# Altium PCB PCB1.PcbDoc
Units mil, origin at the board's own origin, x right, y up, seen from the top; angles counter-clockwise.
Board outline 6000 x 4000 mil, 2 copper layers (Top Layer, Bottom Layer); 71 components, 82 nets, 284 pads, 89 vias.
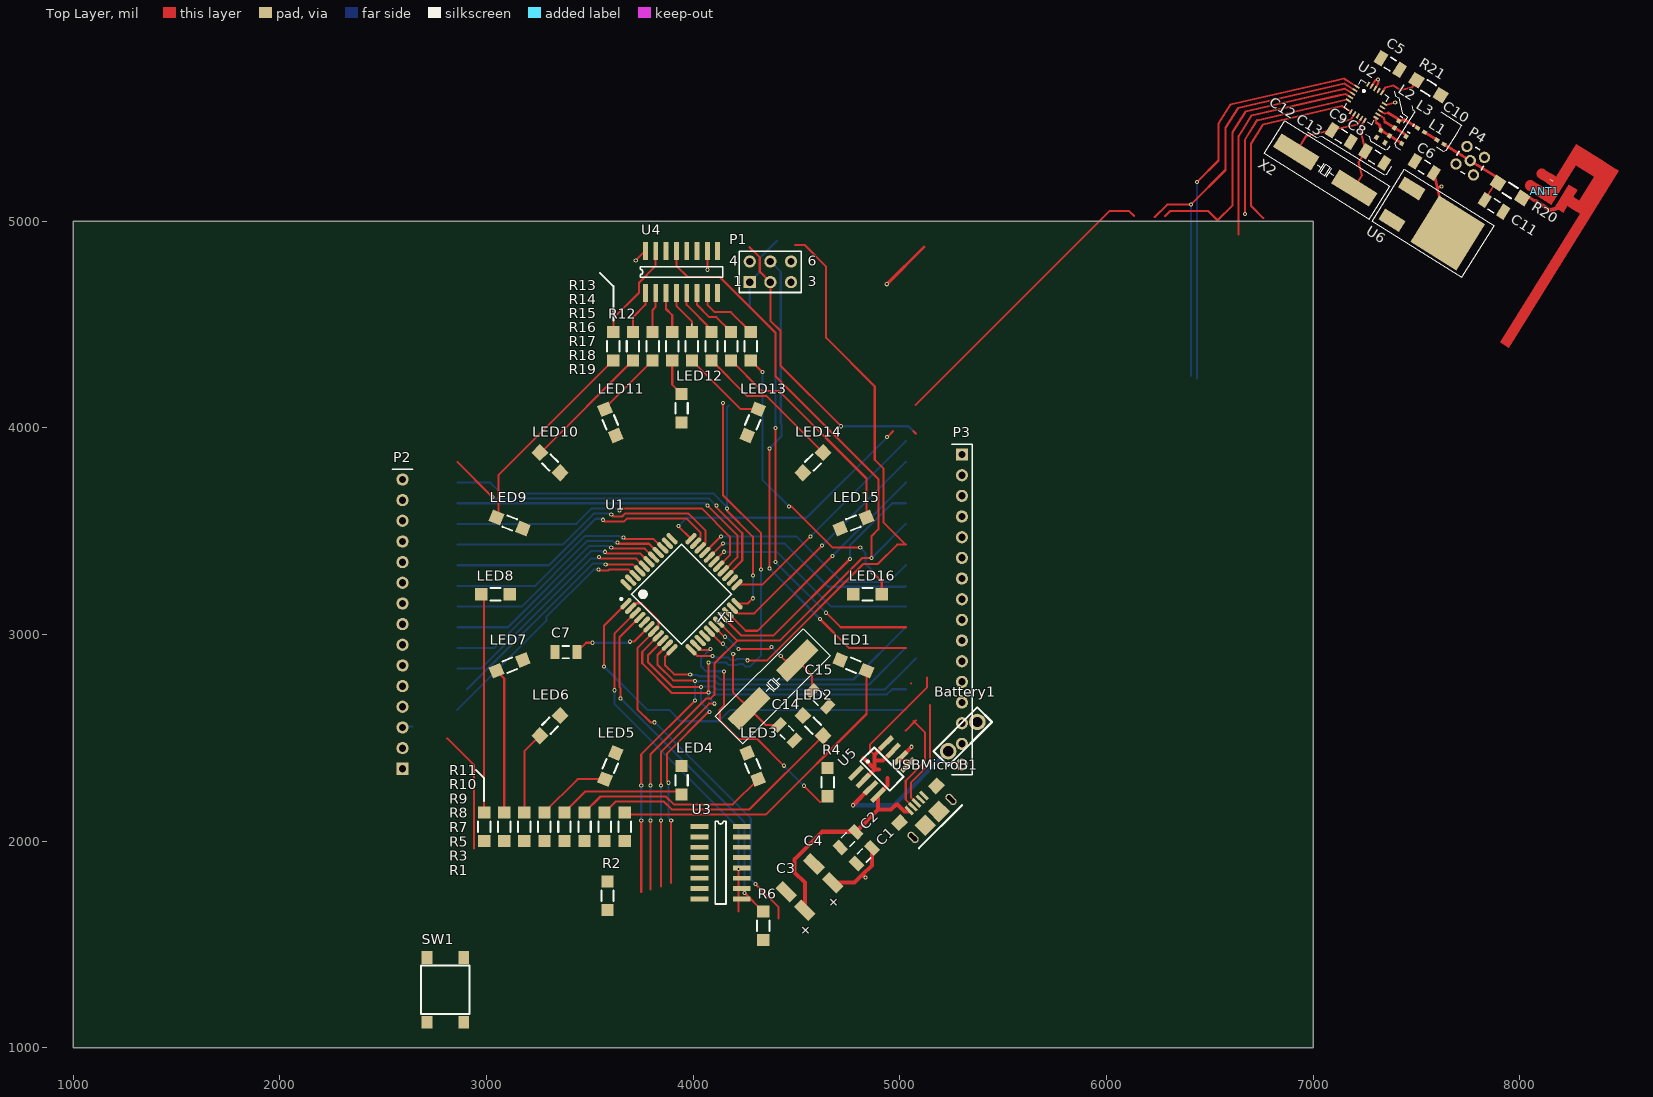
[diagram p0: Top Layer view]
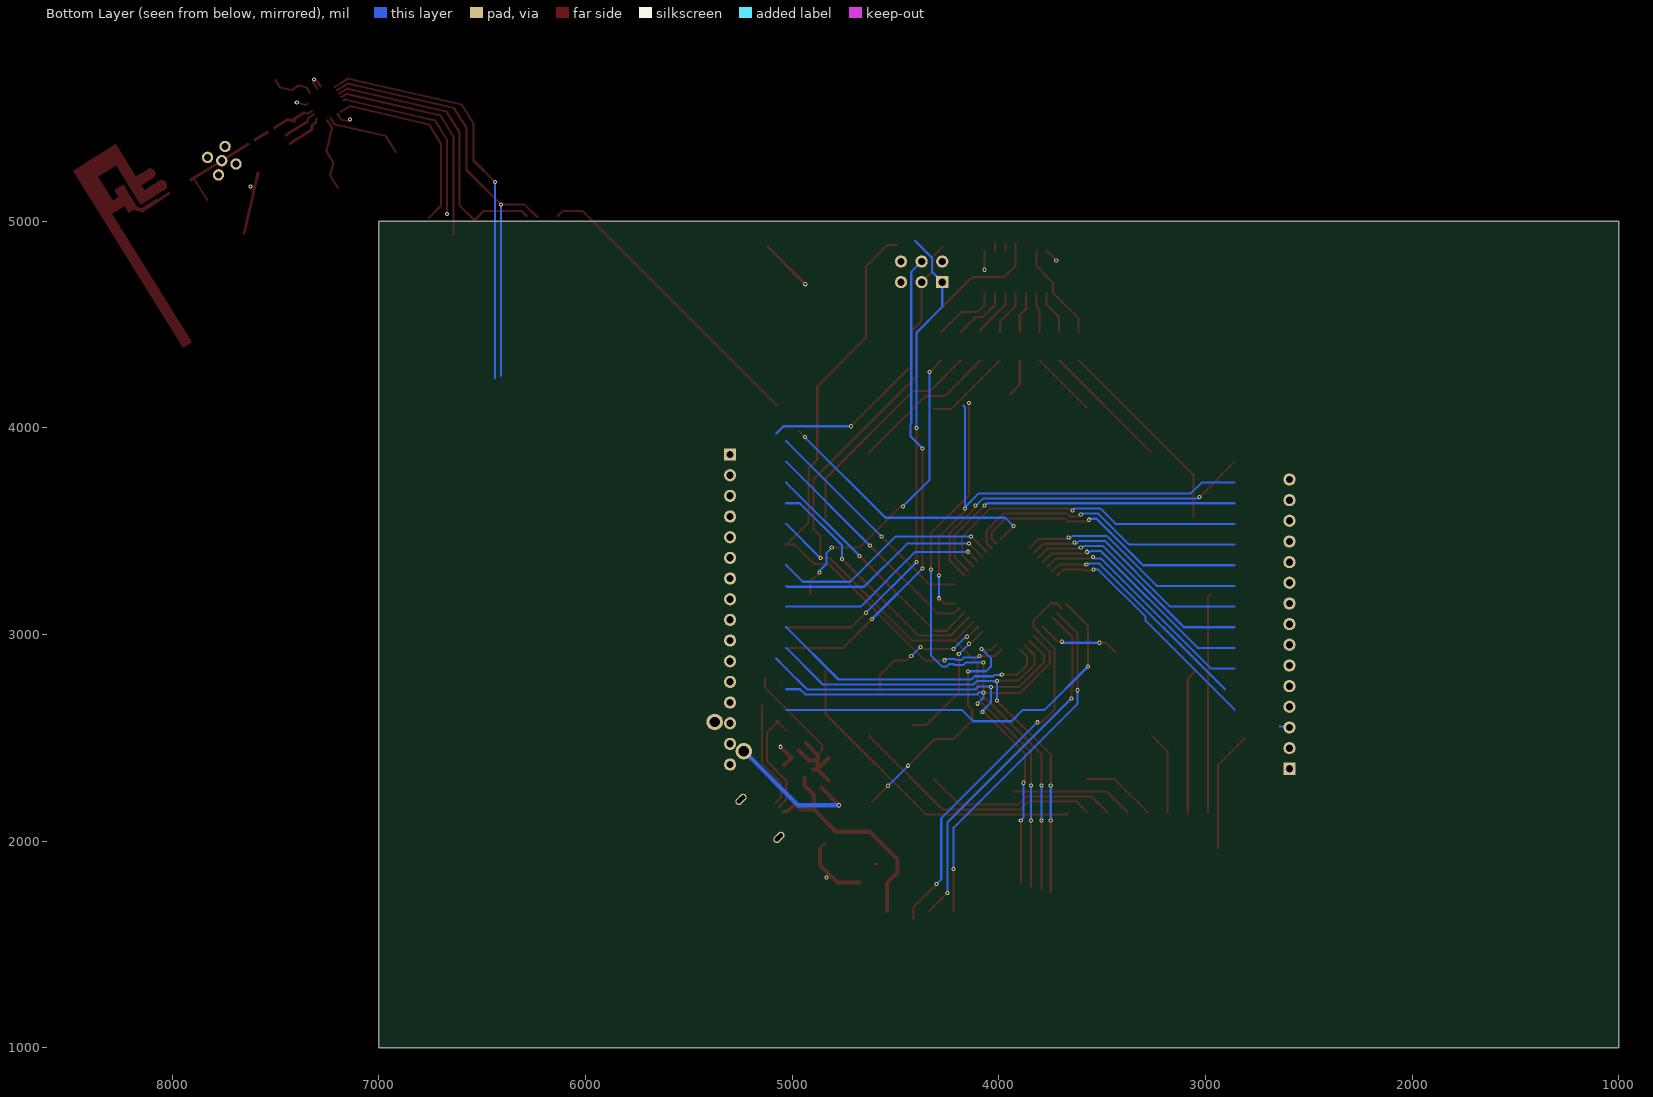
[diagram p1: Bottom Layer view, seen from below]

## Layer stack, top to bottom
Top Solder: solder mask 0.4, Solder Resist, Dk 3.5
Top Layer: signal copper 1.4
Dielectric 1: dielectric 12.6, FR-4, Dk 4.8
Bottom Layer: signal copper 1.4
Bottom Solder: solder mask 0.4, Solder Resist, Dk 3.5

## Board outline
1000,1000 7000,1000 7000,5000 1000,5000

## Design rules (kind name [scope] priority, off if disabled: settings)
Clearance [All] p1: gap=10
PolygonConnect [All] p1: connectstyle=Relief reliefconductorwidth=10 reliefentries=4 polygonreliefangle="90 Angle" airgapwidth=10
RoutingVias [All] p1: holewidth=28 width=50 viastyle="Through Hole" minholewidth=28 minwidth=50 maxholewidth=28 maxwidth=50
SolderMaskExpansion [All] p1: expansion=4
UnpouredPolygon [All] p1: allowunpoured=FALSE
Width [All] p1: maxlimit=10 minlimit=10 preferedwidth=10
29 further rules are at their usual default settings.

## Classes and differential pairs
component class MainBoard: 40 FET1

## Components (designator, comment, footprint, x,y, rotation, side; value= is the part's Value field where it differs from the comment)
ANT1 "INV_F_ANTENNA" INV_F_PCB_ANTENNA 8274.5,5375.87 r238 top
Battery1 "PowerPins" PowerPins_PCB 5303.9,2505.4 r45 top
C1 "Cap Semi" C1206 4826.6,1929.11 r45 top
C2 "Cap Semi" C1206 4748.82,2006.89 r45 top
C3 "Electrolytic Capacitor" sheityCapPackage 4529.62,1674.55 r45 top
C4 "Electrolytic Capacitor" sheityCapPackage 4663.97,1808.9 r45 top
C5 "Cap Semi" C1206 7372.89,5759.71 r148 top
C6 "Cap Semi" C1206 7537.67,5260.82 r328 top
C7 "Cap Semi" C1206 3383.16,2914.39 r180 top
C8 "Cap Semi" 0402 7358.44,5395.41 r58 top
C9 "Cap Semi" 0402 7316.04,5421.91 r58 top
C10 "Cap Semi" 0402 7615.49,5382.19 r148 top
C11 "Cap Semi" C1206 7874.77,5073.76 r328 top
C12 "Cap Semi" C1206 7136.45,5411.3 r148 top
C13 "Cap Semi" C1206 7298.16,5309.39 r148 top
C14 "Cap Semi" C1206 4453.16,2524.39 r315 top
C15 "Cap Semi" C1206 4613.16,2689.39 r315 top
L1 "Inductor" 0402-A 7522.2,5440.48 r328 top
L2 "Inductor" 0402-A 7403.48,5467.5 r238 top
L3 "Inductor" 0402-A 7439,5392.24 r238 top
LED1 "LED_Green_1206Package" 1206Package_PCB 4774.65,2849.97 r157.5 top
LED2 "LED_Green_1206Package" 1206Package_PCB 4579.56,2557.99 r135 top
LED3 "LED_Green_1206Package" 1206Package_PCB 4287.57,2362.89 r112.5 top
LED4 "LED_Green_1206Package" 1206Package_PCB 3943.16,2294.39 r90 top
LED5 "LED_Green_1206Package" 1206Package_PCB 3598.74,2362.89 r67.5 top
LED6 "LED_Green_1206Package" 1206Package_PCB 3306.76,2557.99 r45 top
LED7 "LED_Green_1206Package" 1206Package_PCB 3111.67,2849.97 r22.5 top
LED8 "LED_Green_1206Package" 1206Package_PCB 3043.16,3194.39 r0 top
LED9 "LED_Green_1206Package" 1206Package_PCB 3111.67,3538.8 r337.5 top
LED10 "LED_Green_1206Package" 1206Package_PCB 3306.76,3830.78 r315 top
LED11 "LED_Green_1206Package" 1206Package_PCB 3598.74,4025.88 r292.5 top
LED12 "LED_Green_1206Package" 1206Package_PCB 3943.16,4094.39 r270 top
LED13 "LED_Green_1206Package" 1206Package_PCB 4287.57,4025.88 r247.5 top
LED14 "LED_Green_1206Package" 1206Package_PCB 4579.56,3830.78 r225 top
LED15 "LED_Green_1206Package" 1206Package_PCB 4774.65,3538.8 r202.5 top
LED16 "LED_Green_1206Package" 1206Package_PCB 4843.16,3194.39 r180 top
P1 "Header 3X2A" HDR2X3_CEN 4273.16,4704.39 r0 top
P2 "Header 15" HDR1X15 2593.16,2349.59 r90 top
P3 "Header 16" HDR1X16 5300,3870 r270 top
P4 "COAX-M" MMCX2.54-V5 7759.66,5292.1 r328 top
R1 "Resistor_1206Package" 1206Package_PCB 3668.16,2069.39 r90 top
R2 "Resistor_1206Package" 1206Package_PCB 3585,1735 r270 top
R3 "Resistor_1206Package" 1206Package_PCB 3571.02,2069.39 r90 top
R4 "Resistor_1206Package" 1206Package_PCB 4650,2285 r270 top
R5 "Resistor_1206Package" 1206Package_PCB 3473.87,2069.39 r90 top
R6 "Resistor_1206Package" 1206Package_PCB 4338.16,1589.39 r270 top
R7 "Resistor_1206Package" 1206Package_PCB 3376.73,2069.39 r90 top
R8 "Resistor_1206Package" 1206Package_PCB 3279.59,2069.39 r90 top
R9 "Resistor_1206Package" 1206Package_PCB 3182.45,2069.39 r90 top
R10 "Resistor_1206Package" 1206Package_PCB 3085.3,2069.39 r90 top
R11 "Resistor_1206Package" 1206Package_PCB 2988.16,2069.39 r90 top
R12 "Resistor_1206Package" 1206Package_PCB 3613.16,4394.39 r270 top
R13 "Resistor_1206Package" 1206Package_PCB 3708.16,4394.39 r270 top
R14 "Resistor_1206Package" 1206Package_PCB 3803.16,4394.39 r270 top
R15 "Resistor_1206Package" 1206Package_PCB 3898.16,4394.39 r270 top
R16 "Resistor_1206Package" 1206Package_PCB 3993.16,4394.39 r270 top
R17 "Resistor_1206Package" 1206Package_PCB 4088.16,4394.39 r270 top
R18 "Resistor_1206Package" 1206Package_PCB 4183.16,4394.39 r270 top
R19 "Resistor_1206Package" 1206Package_PCB 4278.16,4394.39 r270 top
R20 "Resistor_1206Package" 1206Package_PCB 7952.7,5147.73 r328 top
R21 "Resistor_1206Package" 1206Package_PCB 7557.89,5644.71 r328 top
SW1 "PushButton" TactileSwitchPCB 2800,1280 r90 top
U1 "ATmega32U4-AU" 44ML_N 3943.16,3194.39 r45 top
U2 "nRF24L01+" 20-VFQFN 7182.47,5528.96 r328 top
U3 "8BitShiftReg" 16-SOIC 4030,2070 r0 top
U4 "8BitShiftReg" 16-SOIC 3768.16,4651.08 r90 top
U5 "DualNP-ChFET" 8-SOIC 4893.78,2222.55 r45 top
U6 "LD1117DT33TR" DPAK 7477.07,5157.83 r238 top
USBMicroB1 "Micro USB Receptacle Type B" USBMicroB_PCB 5155.41,2109.42 r45 top
X1 "HC-49S" HC-49S 4503.16,2874.39 r225 top
X2 "HC-49S" HC-49S 6918.16,5334.39 r328 top

## Footprints (in the part's own frame and the unit in brackets; to place one, negate y for a bottom-side part, rotate by r counter-clockwise, add the part's x,y. Pads: shape width x height; smd on the part's side, far side on the other; paste and mask are expansions set on the pad)
8-SOIC [mm]
  rect 2.2x0.6 smd: 1(0,3.81) 2(0,2.54) 3(0,1.27) 4(0,0) 5(5.2,0) 6(5.2,1.27) 7(5.2,2.54) 8(5.2,3.81)
  silkscreen extent 1.4,-0.63 3.81,4.45
16-SOIC [mm]
  rect 2.2x0.6 smd: 1(0,0) 2(0,-1.27) 3(0,-2.54) 4(0,-3.81) 5(0,-5.08) 6(0,-6.35) 7(0,-7.62) 8(0,-8.89) 9(5.2,-8.89) 10(5.2,-7.62) 11(5.2,-6.35) 12(5.2,-5.08) 13(5.2,-3.81) 14(5.2,-2.54) 15(5.2,-1.27) 16(5.2,0)
  silkscreen extent 1.94,-9.53 3.27,0.64
20-VFQFN [mm] "The package"
  rect 0.7x0.25 smd: 1(-1,3) 2(-1,2.5) 3(-1,2) 4(-1,1.5) 5(-1,1) 11(3,1) 12(3,1.5) 13(3,2) 14(3,2.5) 15(3,3)
  rect 0.25x0.7 smd: 6(0,0) 7(0.5,0) 8(1,0) 9(1.5,0) 10(2,0) 16(2,4) 17(1.5,4) 18(1,4) 19(0.5,4) 20(0,4)
  silkscreen extent -1,0 3,4
44ML_N [mm] "Thin QFP, 44-Leads, Body 10x10mm, Pitch 0.8mm, IPC Medium Density"
  oval 1.75x0.55 smd: 1(-5.65,4) 2(-5.65,3.2) 3(-5.65,2.4) 4(-5.65,1.6) 5(-5.65,0.8) 6(-5.65,0) 7(-5.65,-0.8) 8(-5.65,-1.6) 9(-5.65,-2.4) 10(-5.65,-3.2) 11(-5.65,-4) 23(5.65,-4) 24(5.65,-3.2) 25(5.65,-2.4) 26(5.65,-1.6) 27(5.65,-0.8) 28(5.65,0) 29(5.65,0.8) 30(5.65,1.6) 31(5.65,2.4) 32(5.65,3.2) 33(5.65,4)
  oval 0.55x1.75 smd: 12(-4,-5.65) 13(-3.2,-5.65) 14(-2.4,-5.65) 15(-1.6,-5.65) 16(-0.8,-5.65) 17(0,-5.65) 18(0.8,-5.65) 19(1.6,-5.65) 20(2.4,-5.65) 21(3.2,-5.65) 22(4,-5.65) 34(4,5.65) 35(3.2,5.65) 36(2.4,5.65) 37(1.6,5.65) 38(0.8,5.65) 39(0,5.65) 40(-0.8,5.65) 41(-1.6,5.65) 42(-2.4,5.65) 43(-3.2,5.65) 44(-4,5.65)
  silkscreen extent -5.77,-4.35 4.35,4.95, body extent -5,-5 5,5, height 1.2
0402 [mm] "Chip Capacitor, Body 1.0x0.5mm, IPC High Density"
  rect 0.6x0.5 smd: 1(-0.5,0) 2(0.5,0)
  body extent -0.55,-0.3 0.55,0.3, height 1.3
0402-A [mm] "Chip Inductor, Body 1.0x0.5mm, IPC High Density"
  rect 0.6x0.5 smd: 1(-0.5,0) 2(0.5,0)
  silkscreen extent -1.1,-0.15 -1.1,0.15, body extent -0.55,-0.3 0.55,0.3, height 0.55
1206Package_PCB [mm]
  rect 1.5x1.5 smd: 1(-1.75,0) 2(1.75,0)
  silkscreen extent -0.64,-0.76 0.64,0.76
C1206 [mm] "Chip Capacitor, Body 3.2x1.6mm, IPC High Density"
  rect 1.1x1.7 smd: 1(-1.35,0) 2(1.35,0)
  silkscreen extent -0.4,-0.75 0.4,0.75, body extent -1.7,-0.9 1.7,0.9, height 1.3
DPAK [mm]
  rect 1.6x3 smd: 1(0,0) 3(4.6,0)
  rect 6.7x6.7 smd: 2(2.3,6.65)
  silkscreen extent -1.5,-2 6,11
HC-49S [mm]
  rect 5.5x2 smd: 1(0,0) 2(8.375,0)
  silkscreen extent -3.25,-2.25 12,2.5
HDR1X15 [mm] "Connector; Header; 15 Position"
  rect 1.5x1.5 hole 0.9: 1(0,0)
  round 1.5 hole 0.9: 2(2.54,0) 3(5.08,0) 4(7.62,0) 5(10.16,0) 6(12.7,0) 7(15.24,0) 8(17.78,0) 9(20.32,0) 10(22.86,0) 11(25.4,0) 12(27.94,0) 13(30.48,0) 14(33.02,0) 15(35.56,0)
  silkscreen extent 36.83,-1.27 36.83,1.27
HDR1X16 [mm] "Connector; Header; 16 Position"
  rect 1.5x1.5 hole 0.9: 1(0,0)
  round 1.5 hole 0.9: 2(2.54,0) 3(5.08,0) 4(7.62,0) 5(10.16,0) 6(12.7,0) 7(15.24,0) 8(17.78,0) 9(20.32,0) 10(22.86,0) 11(25.4,0) 12(27.94,0) 13(30.48,0) 14(33.02,0) 15(35.56,0) 16(38.1,0)
  silkscreen extent -1.27,-1.27 39.37,1.27
HDR2X3_CEN [mm] "Connector; Header; 3x2 Position"
  rect 1.5x1.5 hole 0.9: 1(0,0)
  round 1.5 hole 0.9: 2(2.54,0) 3(5.08,0) 4(0,2.54) 5(2.54,2.54) 6(5.08,2.54)
  silkscreen extent -1.27,-1.27 6.35,3.81
INV_F_PCB_ANTENNA [mm]
  rect 0.2x0.5 smd: 1(5.5,-0.2) 2(7.25,-0.2) 3(8.696,-0.2)
  Top Layer region: 0.127,0.043 0.127,0.04 0.129,0.038 0.131,0.037 0.133,0.036 0.133,0.036 4.81,0.047 4.81,-0.598 4.811,-0.6 4.812,-0.602 4.814,-0.604 4.817,-0.604 4.817,-0.604 6.077,-0.601 6.081,-0.6 6.083,-0.598 6.084,-0.595 6.084,-0.595 6.084,0.05 6.775,0.052 6.775,-0.593 6.776,-0.596 6.777,-0.598 6.779,-0.599 6.782,-0.6 6.782,-0.6 8.016,-0.597 8.02,-0.596 8.022,-0.593 8.023,-0.59 8.023,-0.59 8.023,-0.033 8.023,1.343 8.022,1.346 8.021,1.348 8.019,1.35 8.016,1.35 8.016,1.35 2.32,1.337 2.32,3.977 5.81,3.985 5.81,3.109 4.817,3.107 4.814,3.106 4.811,3.103 4.81,3.1 4.81,3.1 4.81,1.897 4.811,1.895 4.812,1.893 4.814,1.891 4.817,1.891 4.817,1.891 8.014,1.898 8.459,1.456 8.459,-0.589 8.46,-0.592 8.461,-0.594 8.463,-0.595 8.466,-0.596 8.466,-0.596 8.926,-0.595 8.929,-0.594 8.932,-0.591 8.933,-0.588 8.933,-0.588 8.933,1.649 8.932,1.652 8.931,1.654 8.931,1.654 8.931,1.654 8.931,1.654 8.931,1.654 8.931,1.654 8.931,1.654 8.118,2.46 8.118,3.108 8.118,3.11 8.116,3.112 8.114,3.114 8.112,3.114 8.112,3.114 7.119,3.112 7.119,3.995 7.119,4.982 25.708,5.026 25.711,5.027 25.713,5.029 25.714,5.032 25.714,5.032 25.714,6.235 25.714,6.238 25.712,6.24 25.71,6.241 25.708,6.242 25.708,6.242 0.134,6.182 0.13,6.181 0.128,6.179 0.127,6.176 0.127,6.176 0.127,4.973 0.127,3.979 0.127,1.325
MMCX2.54-V5 [mm] "Connector; RF Coaxial, MMCX, Thru-Hole; 5 Position; Vertical"
  round 1.4 hole 0.85: 1(0,0) 2(-1.27,-1.27) 3(1.27,-1.27) 4(1.27,1.27) 5(-1.27,1.27)
  silkscreen extent -1.75,-1.75 1.75,1.75
PowerPins_PCB [mil]
  round 80 hole 50: 1(-100,0) 2(100,0)
  silkscreen extent -150,-50 150,50
sheityCapPackage [mm] "This is jank"
  rect 1.3x2.5 smd: 1(0,-0.375) 2(0,2.875)
TactileSwitchPCB [mm]
  rect 1.55x1.3 smd: 1(-3.975,2.25) 2(3.975,2.25) 3(-3.975,-2.25) 4(3.975,-2.25)
  silkscreen extent -3,-3 3,3
USBMicroB_PCB [mm]
  rect 0.4x1.35 smd: 1(-1.3,2.667) 2(-0.65,2.667) 3(0,2.675) 4(0.65,2.667) 5(1.3,2.667)
  oval 0.9x1.6 hole 0.5 slot 1.2 at 90 deg: CASE(-3.3,0) CASE(3.3,0)
  rect 1.6x1.4 smd: CASE(-3.2,2.45) CASE(3.2,2.45)
  rect 1.9x1.9 smd: CASE(-1.2,0) CASE(1.2,0)
  silkscreen extent -3.75,-1.45 3.75,-1.45

## Part data
ANT1: library part INV_V_ANTENNA
C1 C2 C5 C6 C7 C8 C9 C10 C11 C12 C13 C14 C15: "Capacitor (Semiconductor SIM Model)"
C3 C4: "asdf"
LED1 LED2 LED3 LED4 LED5 LED6 LED7 LED8 LED9 LED10 LED11 LED12 LED13 LED14 LED15 LED16: "Green LED"
P1: "Header, 3-Pin, Dual row"
P2: "Header, 15-Pin"
P3: "Header, 16-Pin"
P4: "RF Coaxial PCB Connector, MMCX; Thru-Hole, Vertical Mount Plug,  50 Ohm Impedance"
R1 R2 R3 R4 R5 R6 R7 R8 R9 R10 R11 R12 R13 R14 R15 R16 R17 R18 R19 R20 R21: "Resistor 1206"
SW1: library part TactileButton, "Normally open push button."
U1: "8-bit AVR Microcontroller, 2.7-5.5V, 32KB Flash, 2.5KB EEPROM, 1KB SRAM, USB Controller, 44-pin TQFP, Industrial Grade (-40°C to 85°C)"
U2: "2.4GHz RF Transceiver"
U3 U4: library part 8BitShiftRegister
U5: library part "Dual N & P-Channel MOSFET"
USBMicroB1: library part USBMicroB

## Free pads (board coordinates)
  rect 7.87x19.68 smd: 0(3993.16,4493.58)

## Via types
v1: diameter 20, hole 10, Top Layer to Bottom Layer, 89 vias

## Nets (pads, with @x,y where several pads share a name; then routed paths per layer and width w, separated by ;. In a path a pad name is that pad's centre, name@x,y a point inside that pad or via, vN(x,y) a via of type N, cw(c..) or ccw(c..) an arc to the next point about the centre after c; other vN are vias at no path point)
3V3: 
ANT1: 
ANT2: 
AREF: 
BATT: 
D+: 
D-: 
GND: 
HWB: 
MISO: 
MOSI: 
NetC7_1: 
NetC10_1: 
NetC10_2: 
NetC12_2: 
NetC13_2: 
NetC14_1: 
NetC15_1: 
NetE1_1: 
NetLED1_1: 
NetLED2_1: 
NetLED3_1: 
NetLED4_1: 
NetLED5_1: 
NetLED6_1: 
NetLED7_1: 
NetLED8_1: 
NetLED9_1: 
NetLED10_1: 
NetLED11_1: 
NetLED12_1: 
NetLED13_1: 
NetLED14_1: 
NetLED15_1: 
NetLED16_1: 
NetP2_3: 
NetP2_4: 
NetP2_5: 
NetP2_6: 
NetP2_7: 
NetP2_8: 
NetP2_9: 
NetP2_10: 
NetP2_11: 
NetP2_12: 
NetP2_14: 
NetP3_2: 
NetP3_3: 
NetP3_4: 
NetP3_7: 
NetP3_8: 
NetP3_9: 
NetR4_2: 
NetR6_2: 
PB7: 
PD0: 
PD5: 
PE2: 
PE6: 
Q0: 
Q1: 
Q2: 
Q3: 
Q4: 
Q5: 
Q6: 
Q7: 
Q8: 
Q9: 
Q10: 
Q11: 
Q12: 
Q13: 
Q14: 
Q15: 
RESET: 
RST: 
SCK: 
SS: 
USB: 
VCC: 
VDD_PA: 
pads on no net: ANT1.1 ANT1.2 ANT1.3 Battery1.1 Battery1.2 C1.1 C1.2 C2.1 C2.2 C3.1 C3.2 C4.1 C4.2 C5.1 C5.2 C6.1 C6.2 C7.1 C7.2 C8.1 C8.2 C9.1 C9.2 C10.1 C10.2 C11.1 C11.2 C12.1 C12.2 C13.1 C13.2 C14.1 C14.2 C15.1 C15.2 L1.1 L1.2 L2.1 L2.2 L3.1 L3.2 LED1.1 LED1.2 LED2.1 LED2.2 LED3.1 LED3.2 LED4.1 LED4.2 LED5.1 LED5.2 LED6.1 LED6.2 LED7.1 LED7.2 LED8.1 LED8.2 LED9.1 LED9.2 LED10.1 LED10.2 LED11.1 LED11.2 LED12.1 LED12.2 LED13.1 LED13.2 LED14.1 LED14.2 LED15.1 LED15.2 LED16.1 LED16.2 P1.1 P1.2 P1.3 P1.4 P1.5 P1.6 P2.1 P2.2 P2.3 P2.4 P2.5 P2.6 P2.7 P2.8 P2.9 P2.10 P2.11 P2.12 P2.13 P2.14 P2.15 P3.1 P3.2 P3.3 P3.4 P3.5 P3.6 P3.7 P3.8 P3.9 P3.10 P3.11 P3.12 P3.13 P3.14 P3.15 P3.16 P4.1 P4.2 P4.3 P4.4 P4.5 R1.1 R1.2 R2.1 R2.2 R3.1 R3.2 R4.1 R4.2 R5.1 R5.2 R6.1 R6.2 R7.1 R7.2 R8.1 R8.2 R9.1 R9.2 R10.1 R10.2 R11.1 R11.2 R12.1 R12.2 R13.1 R13.2 R14.1 R14.2 R15.1 R15.2 R16.1 R16.2 R17.1 R17.2 R18.1 R18.2 R19.1 R19.2 R20.1 R20.2 R21.1 R21.2 SW1.1 SW1.2 SW1.3 SW1.4 U1.1 U1.2 U1.3 U1.4 U1.5 U1.6 U1.7 U1.8 U1.9 U1.10 U1.11 U1.12 U1.13 U1.14 U1.15 U1.16 U1.17 U1.18 U1.19 U1.20 U1.21 U1.22 U1.23 U1.24 U1.25 U1.26 U1.27 U1.28 U1.29 U1.30 U1.31 U1.32 U1.33 U1.34 U1.35 U1.36 U1.37 U1.38 U1.39 U1.40 U1.41 U1.42 U1.43 U1.44 U2.1 U2.2 U2.3 U2.4 U2.5 U2.6 U2.7 U2.8 U2.9 U2.10 U2.11 U2.12 U2.13 U2.14 U2.15 U2.16 U2.17 U2.18 U2.19 U2.20 U3.1 U3.2 U3.3 U3.4 U3.5 U3.6 U3.7 U3.8 U3.9 U3.10 U3.11 U3.12 U3.13 U3.14 U3.15 U3.16 U4.1 U4.2 U4.3 U4.4 U4.5 U4.6 U4.7 U4.8 U4.9 U4.10 U4.11 U4.12 U4.13 U4.14 U4.15 U4.16 U5.1 U5.2 U5.3 U5.4 U5.5 U5.6 U5.7 U5.8 U6.1 U6.2 U6.3 USBMicroB1.1 USBMicroB1.2 USBMicroB1.3 USBMicroB1.4 USBMicroB1.5 USBMicroB1.CASE X1.1 X1.2 X2.1 X2.2
copper on no net: | length 95513.3
  Top Layer w3.94: 8060,5173.32 8116.56,5137.98
  Top Layer w10: 2809.63,2496.99 2939.63,2366.99 2939.63,1963.09 ; 2858.16,3834.39 v1(3028.16,3664.39) ; 2974.26,3194.39 2988.16,3180.49 2988.16,2138.28 ; 3048.01,2823.61 3085.3,2786.32 3085.3,2138.28 ; 3057.16,3565.17 3057.16,3769.49 3613.16,4325.49 ; 3182.45,2138.28 3182.45,2433.67 3258.05,2509.27 ; 3262.17,3879.5 3708.16,4325.49 ; 3279.59,2138.28 3440.55,2299.24 3572.38,2299.24 ; 3376.73,2138.28 3477.83,2239.39 3929.26,2239.39 ; 3436.31,2914.39 3481.31,2959.39 v1(3513.16,2959.39) ; 3473.87,2138.28 3550.98,2215.39 3867.34,2215.39 3905.76,2176.96 4191.66,2176.96 4313.94,2299.24 ; v1(3542.16,3313.39) 3547.16,3308.39 3588.17,3308.39 3593.17,3313.39 3688.17,3313.39 3716.7,3284.86 3719.06,3284.86 ; v1(3543.16,3374.39) 3551.16,3366.39 3724.26,3366.39 3762.42,3328.22 3763.6,3329.4 ; v1(3563.16,3554.39) 3571.16,3546.39 3665.11,3546.39 3680.11,3561.39 3966.33,3561.39 4035.62,3492.09 4035.62,3462.66 4016.09,3443.12 4011.37,3443.12 ; v1(3568.16,2844.39) 3568.16,3042.1 3674.52,3148.45 ; 3571.02,2138.28 3624.12,2191.39 3857.4,2191.39 3895.82,2152.96 4271.96,2152.96 4628.27,2509.27 ; 3572.38,4094.71 3803.16,4325.49 ; v1(3573.16,3399.39) 3582.16,3390.39 3744.8,3390.39 3784.69,3350.5 3785.87,3351.68 ; v1(3576.16,3337.39) 3708.72,3337.39 3740.15,3305.95 3741.33,3307.13 ; v1(3603.16,3419.39) 3608.16,3414.39 3765.34,3414.39 3806.96,3372.77 3808.14,3373.95 ; v1(3603.16,3579.39) 3612.16,3570.39 3655.17,3570.39 3670.17,3585.39 3976.27,3585.39 ; 3613.16,4463.28 3613.16,4529.39 3737.35,4653.58 3737.35,4702.26 3818.16,4783.07 3818.16,4855.8 ; v1(3618.16,2729.39) 3618.16,3003.01 3719.06,3103.91 ; v1(3633.16,3444.39) 3639.16,3438.39 3785.88,3438.39 3829.23,3395.04 ; v1(3643.16,3599.39) 3653.16,3609.39 4040.09,3609.39 4177.16,3472.31 4177.16,3383.39 4124.36,3330.58 ; v1(3648.16,2689.39) 3647.16,2690.39 3647.16,2741.4 3642.16,2746.4 3642.16,2984.83 3736.61,3079.28 3741.33,3079.28 ; v1(3663.16,3469.39) 3670.16,3462.39 3806.43,3462.39 3851.5,3417.31 ; 3668.16,2138.28 3668.16,2128.96 4352.73,2128.96 4838.3,2614.53 4838.3,2823.61 ; v1(3693.16,2964.39) 3713.16,2964.39 3785.87,3037.1 ; 3696.79,3126.18 3697.97,3125 3697.97,3129.72 3718.69,3150.44 3748.12,3150.44 3832.4,3066.16 3832.4,3036.72 3811.68,3016.01 3806.96,3016.01 3808.14,3014.83 3808.14,3012.47 3729.16,2933.48 3729.16,2638.39 3793.16,2574.39 v1(3813.16,2574.39) ; 3708.16,4463.28 3708.16,4534.39 3768.16,4594.39 3768.16,4651.08 ; v1(3721.74,4809.39) 3768.16,4855.8 ; 3748.16,1753.37 v1(3748.16,2099.39) ; v1(3748.16,2269.39) 3748.16,2419.39 v1(4008.16,2679.39) ; 3793.16,1764.43 v1(3793.16,2099.39) ; v1(3793.16,2269.39) 3793.16,2419.39 4064.16,2690.39 4085.17,2690.39 4102.16,2707.37 4102.16,2858.84 4212.7,2969.39 ; 3803.16,4463.28 3803.16,4569.39 3818.16,4584.39 3818.16,4651.08 ; 3830.41,2992.55 3753.16,2915.3 3753.16,2859.39 3897.16,2715.39 4069.16,2715.39 v1(4073.16,2719.39) v1(4073.16,2864.39) ; 3843.16,1780.49 v1(3843.16,2099.39) ; v1(3843.16,2269.39) 3843.16,2430.4 4077.15,2664.39 v1(4103.16,2664.39) ; 3852.68,2970.28 3780.13,2897.73 3780.13,2866.36 3901.1,2745.39 4037.16,2745.39 v1(4038.16,2744.39) ; 3868.16,4651.08 3868.16,4574.39 3898.16,4544.39 3898.16,4463.28 ; 3874.95,2948.01 3827.1,2900.16 3827.1,2853.33 3903.04,2777.39 4005.16,2777.39 v1(4008.16,2774.39) ; v1(3880.66,2281.89) 3873.16,2289.39 3873.16,2424.39 4073.16,2624.39 v1(4078.16,2624.39) ; 3893.16,1796.55 v1(3893.16,2099.39) ; 3897.23,2925.74 3863.16,2891.68 3863.16,2851.21 3907.98,2806.39 v1(3985.16,2806.39) ; 3898.16,4325.49 3898.16,4208.28 3943.16,4163.28 ; 3918.16,4651.08 3918.16,4589.39 3993.16,4514.39 3993.16,4463.28 ; 3918.16,4890.7 3918.16,4855.8 3918.16,4784.39 3973.16,4729.39 4128.16,4729.39 4398.16,4459.39 4398.16,4249.39 4895.88,3751.66 4895.88,3508.59 4863.16,3475.87 v1(4863.16,3369.39) 4818.16,3369.39 4418.16,2969.39 4212.7,2969.39 ; v1(3928.16,3523.97) 3989.09,3463.03 ; 3968.16,4651.08 3968.16,4594.39 4088.16,4474.39 4088.16,4463.28 ; 3968.16,4855.8 3968.16,4889.39 ; 3978.27,3583.39 4059.62,3502.03 4059.62,3442.12 4037.18,3419.67 4032.46,3419.67 ; 3989.09,2925.74 4020.45,2894.39 v1(4093.16,2894.39) ; 3993.16,4325.49 4229.12,4089.53 4313.94,4089.53 ; 4011.37,2948.01 4013.73,2948.01 4037.98,2923.75 4077.53,2923.75 v1(4083.16,2929.39) ; 4018.16,4651.08 4018.16,4594.39 4077.16,4535.39 4111.06,4535.39 4183.16,4463.28 ; 4018.16,4855.8 4018.16,4894.39 ; 4055.91,3396.22 v1(4134.08,3474.39) ; v1(4068.16,3624.39) 4213.16,3479.39 4213.16,3372.94 4148.53,3308.31 4143.81,3308.31 ; 4068.16,4651.08 4068.16,4594.39 4103.16,4559.39 4182.06,4559.39 4278.16,4463.28 ; v1(4068.16,4764.39) 4068.16,4855.8 ; 4078.18,3014.83 4138.62,2954.39 v1(4143.16,2954.39) ; 4078.18,3373.95 v1(4143.16,3438.93) ; 4088.16,4325.49 4259.26,4154.39 4353.39,4154.39 4628.27,3879.5 ; 4100.45,3037.1 4149.16,2988.39 v1(4152.69,2988.39) ; 4100.45,3351.68 v1(4148.16,3399.39) ; v1(4113.16,3624.39) 4113.16,3613.33 4237.16,3489.33 4237.16,3357.12 4167.26,3287.22 4167.26,3284.86 ; 4122.72,3059.37 4212.7,2969.39 ; v1(4143.16,4119.39) 4143.16,3674.39 4328.16,3489.39 v1(4328.16,3314.39) ; 4144.99,3081.64 4233.24,2993.39 4387.16,2993.39 v1(4758.16,3364.39) ; v1(4148.16,2819.39) 4148.16,2654.39 4128.16,2634.39 4128.16,2584.39 4218.16,2494.39 4308.16,2494.39 v1(4438.16,2364.39) ; v1(4163.16,3609.39) 4163.16,3597.27 4288.16,3472.27 v1(4288.16,3284.39) ; 4167.26,3103.91 4253.79,3017.39 4311.16,3017.39 v1(4673.16,3379.39) ; 4183.16,4325.49 4330.26,4178.39 4414.16,4178.39 4838.3,3754.24 4838.3,3565.17 ; 4189.53,3126.18 4191.89,3126.18 4216.15,3101.92 4295.7,3101.92 v1(4623.16,3429.39) ; v1(4193.16,2904.39) 4193.16,2718.09 4270.01,2641.24 4349.28,2561.97 4415.58,2561.97 ; 4211.8,3148.45 4262.23,3148.45 v1(4288.16,3174.39) ; 4211.8,3240.32 4334.09,3240.32 v1(4568.16,3474.39) ; 4218.16,1658.28 v1(4218.16,1864.39) ; v1(4218.16,2929.39) 4368.16,2929.39 v1(4378.16,2939.39) ; v1(4248.16,1748.33) 4338.16,1658.33 ; v1(4263.16,2874.39) 4357.1,2874.39 4823.1,3340.39 4892.16,3340.39 4986.16,3434.39 5028.16,3434.39 4919.88,3542.66 4919.88,3803.33 4878.16,3845.05 4878.16,4199.39 4643.16,4434.39 4643.16,4779.39 4538.16,4884.39 4493.16,4884.39 ; 4271.79,4874.39 4321.69,4824.49 4321.69,4755.86 4373.16,4704.39 4373.16,4518.33 4422.16,4469.33 4422.16,4300.39 v1(4715.63,4006.91) ; 4278.16,4325.49 v1(4334.26,4269.39) ; v1(4301.04,1791.5) 4413.16,1679.39 4413.16,1624.39 ; v1(4368.16,3319.39) v1(4368.16,3899.39) ; 4373.16,4804.39 4374.3,4805.52 ; v1(4398.16,3349.39) v1(4398.16,3999.39) ; v1(4423.16,2894.39) 4443.16,2874.39 4503.16,2874.39 4575.58,2801.97 4575.58,2726.97 ; v1(4463.16,3619.39) 4474.17,3619.39 4674.17,3419.39 v1(4808.16,3419.39) ; v1(4535.13,2267.42) 4614.58,2187.97 ; 4583.93,1888.93 4602.58,1888.93 ; v1(4613.16,3074.39) 4753.16,2934.39 5028.16,2934.39 ; v1(4643.16,3104.39) 4713.16,3034.39 5028.16,3034.39 ; 4839.86,1982.62 4844.06,1986.81 4864.18,1966.69 ; v1(4868.16,3299.39) 4912.06,3255.49 4912.06,3194.39 ; 4876.1,2417.01 4854.89,2438.22 4854.89,2466.51 5130.66,2742.28 5130.66,2791.78 ; v1(4938.16,3954.39) 4966.69,3982.91 ; 5028.16,2534.39 5076.69,2582.91 ; 5063.07,2165.57 5028.13,2200.51 5028.13,2291.85 5120.8,2384.52 5120.8,2525.86 5066.24,2580.42 ; 5065.56,3982.91 5076.69,3971.78 ; 5074.63,4109.26 6014.75,5049.39 6108.16,5049.39 6133.16,5024.39 ; 5080.94,2183.89 5052.88,2211.95 5052.88,2282.66 5144.8,2374.58 5144.8,2658.98 ; 6233.16,5019.39 6293.16,5079.39 v1(6408.16,5079.39) 6575.69,5246.92 6575.69,5450.72 6635.2,5545.95 7150.59,5664.94 7201.24,5633.29 ; 6283.16,5024.39 6306.88,5048.11 6493.06,5048.11 6536.79,5004.39 6609.61,5077.21 6609.61,5429.52 6671.77,5528.99 7114.69,5631.25 7153.15,5640.13 7190.8,5616.6 ; v1(6438.16,5189.39) 6541.77,5293 6541.77,5471.91 6598.63,5562.91 7110.45,5681.07 7148.03,5689.75 7211.67,5649.98 ; 6639.3,4935.52 6639.3,5410.97 6701.45,5510.45 7116.82,5606.34 7155.7,5615.32 7180.37,5599.9 ; v1(6668.98,5033.57) 6668.98,5392.43 6728.49,5487.66 7123.18,5578.78 7162.5,5587.86 7169.94,5583.21 ; 6758.16,5014.39 6698.66,5073.89 6698.66,5373.88 6756.95,5467.16 7139.88,5555.57 7150.65,5548.84 7182.47,5528.96 ; 6918.16,5334.39 6965.69,5410.45 7091.37,5439.47 7213.85,5467.74 7232.55,5497.66 ; v1(7139.62,5491.86) 7152.34,5483.91 7181.78,5490.71 7199.16,5518.53 ; 7197.78,5159.66 7235.16,5219.48 7220.09,5284.75 7253.09,5337.55 7226.9,5450.96 ; 7226.81,5451.34 7249.24,5487.23 ; 7282.61,5652.08 7301.01,5681.52 v1(7312.91,5684.27) 7316.42,5669.04 7299.3,5641.64 ; 7301.21,5496.1 7305.99,5475.35 ; 7313.92,5516.45 7341.77,5499.05 7346.14,5480.12 ; 7324.35,5533.14 7346.09,5519.56 7361.61,5523.14 ; 7332.69,5620.78 7349.06,5646.98 7386.91,5655.71 7422.62,5633.4 7477.5,5646.07 7499.46,5681.22 ; 7345.22,5566.53 7351.56,5562.57 v1(7396.66,5572.98) ; 7405.72,5482.3 7413.91,5484.19 ; 7829.69,5101.93 7895.31,5206.94
  Top Layer w14: v1(4936.24,4694.39) 5116.1,4874.25 ; 7305.99,5475.35 7321.07,5465.93 7327.33,5438.8 7428.57,5375.55 ; 7346.14,5480.12 7393.05,5450.8 7447.64,5416.69 ; 7361.61,5523.14 7412.22,5491.52 ; 7413.91,5484.19 7441.91,5490.65 7505.51,5450.91 ; 7538.9,5430.05 7598.79,5392.62 ; 7584.31,5231.67 7600.22,5162.78 ; v1(7620.89,5167.55) 7600.22,5162.78 ; 7632.18,5371.76 7759.66,5292.1 7909,5198.78 ; 7651.12,4942.3 7600.22,5162.78
  Top Layer w14.5: 8014.04,5133.82 8077.11,5094.41
  Top Layer w20: 4540.06,1664.11 4540.06,1798.46 4490.73,1847.79 4490.73,1911.43 4623.77,2044.47 4786.4,2044.47 4893.78,2151.84 ; 4674.41,1798.46 4780.81,1798.46 4819.53,1837.18 ; v1(4773.57,2173.06) 4858.42,2257.91 ; 4823.07,2293.26 4876.1,2346.3 ; 4823.93,2401.07 4866.36,2358.64 ; v1(4833.67,1823.04) 4819.53,1837.18 ; 4864.18,1966.69 4864.18,1881.84 4819.53,1837.18 ; 4897.31,2346.3 4876.1,2346.3 ; 4932.47,2473.38 4876.1,2417.01 4876.1,2388.72 ; 4939.74,2303.87 4939.74,2268.52 4893.78,2222.55 4893.78,2151.84 ; 4967.83,2438.03 4918.53,2388.72 4876.1,2388.72 ; 5038.54,2367.32 5003.18,2402.67 v1(5056.41,2455.9) ; 5040.53,2143.03 5022.11,2143.03 4988.55,2176.59 4982.17,2176.59 4957.42,2151.84 4893.78,2151.84 ; 4876.1,2346.3 4876.1,2388.72
  Top Layer w51.18: 8051.09,5171.84 8102.48,5139.73 ; 8105.93,5228.37 8146.67,5202.91
  Bottom Layer w10: 2593.16,2554.39 2640.28,2554.39 ; 2858.16,2634.39 3289.16,3065.39 3289.16,3084.33 3518.22,3313.39 v1(3542.16,3313.39) ; 2858.16,2834.39 2971.34,2834.39 3503.34,3366.39 3535.16,3366.39 v1(3543.16,3374.39) ; 2858.16,2934.39 3037.4,2934.39 3506.4,3403.39 3555.17,3403.39 3568.67,3389.89 3573.16,3394.39 v1(3573.16,3399.39) ; 2858.16,3034.39 3103.45,3034.39 3497.45,3428.39 3585.17,3428.39 3594.17,3419.39 v1(3603.16,3419.39) ; 2858.16,3134.39 3169.51,3134.39 3487.51,3452.39 3611.17,3452.39 3626.17,3437.39 v1(3633.16,3444.39) ; 2858.16,3234.39 3235.57,3234.39 3477.57,3476.39 3642.17,3476.39 3656.17,3462.39 v1(3663.16,3469.39) ; 2858.16,3334.39 3301.63,3334.39 3526.63,3559.39 3558.16,3559.39 v1(3563.16,3554.39) ; 2858.16,3434.39 3367.69,3434.39 3517.69,3584.39 3598.16,3584.39 v1(3603.16,3579.39) ; 2858.16,3534.39 3433.75,3534.39 3508.75,3609.39 3633.16,3609.39 v1(3643.16,3599.39) ; 2858.16,3634.39 4058.16,3634.39 v1(4068.16,3624.39) ; 2858.16,3734.39 3018.16,3734.39 3070.16,3682.39 4096.17,3682.39 v1@4163.16,3615.4 ; 2905.28,2734.39 3513.28,3342.39 3571.16,3342.39 v1(3576.16,3337.39) ; v1(3028.16,3664.39) 3034.16,3658.39 4075.17,3658.39 4109.17,3624.39 v1(4113.16,3624.39) ; v1(3513.16,2959.39) 3693.16,2959.39 v1(3693.16,2964.39) ; v1(3568.16,2844.39) 3778.16,2634.39 3883.16,2634.39 3938.16,2579.39 4123.16,2579.39 4178.16,2634.39 5028.16,2634.39 ; v1(3618.16,2729.39) 3618.16,2664.39 4218.16,2064.39 v1(4218.16,1864.39) ; v1(3648.16,2689.39) 4248.16,2089.39 v1(4248.16,1748.33) ; v1(3748.16,2099.39) v1(3748.16,2269.39) ; v1(3793.16,2099.39) v1(3793.16,2269.39) ; v1(3813.16,2574.39) 4278.16,2109.39 4278.16,1814.39 v1(4301.04,1791.5) ; v1(3843.16,2099.39) v1(3843.16,2269.39) ; v1(3880.66,2281.89) 3880.66,2111.89 v1(3893.16,2099.39) ; v1(3928.16,3523.97) 3968.58,3564.39 4548.16,3564.39 v1(4938.16,3954.39) ; v1(3985.16,2806.39) 3992.15,2799.39 3996.15,2803.39 4020.17,2803.39 4026.17,2797.39 4116.98,2797.39 4132.98,2781.39 4775.16,2781.39 5028.16,3034.39 ; v1(4008.16,2679.39) v1(4008.16,2774.39) 4007.16,2773.39 4016.23,2773.39 4021.19,2768.43 4026.15,2773.39 4107.04,2773.39 4123.04,2757.39 4851.16,2757.39 5028.16,2934.39 ; 4038.16,2729.39 v1(4038.16,2744.39) ; v1(4073.16,2864.39) 4158.21,2864.39 4171.21,2851.39 4215.11,2851.39 4220.11,2856.39 4240.15,2856.39 4251.15,2845.39 4275.17,2845.39 4328.16,2898.37 v1(4328.16,3314.39) ; v1(4078.16,2624.39) 4083.16,2624.39 4038.16,2669.39 v1(4038.16,2744.39) ; v1(4083.16,2929.39) 4038.16,2884.39 4038.16,2844.39 4061.16,2821.39 4146.16,2821.39 v1(4148.16,2819.39) ; v1@4093.16,2889.39 v1(4093.16,2894.39) 4099.16,2888.39 4168.15,2888.39 4181.15,2875.39 4205.17,2875.39 4210.17,2880.39 4250.09,2880.39 4256.09,2874.39 v1(4263.16,2874.39) ; v1(4103.16,2664.39) 4073.16,2694.39 v1(4073.16,2719.39) 4093.16,2719.39 4103.16,2709.39 4937.1,2709.39 4962.1,2734.39 5028.16,2734.39 ; v1(4134.08,3474.39) 4498.16,3474.39 4718.16,3254.39 4948.16,3254.39 5028.16,3334.39 ; v1(4143.16,2954.39) v1(4193.16,2904.39) ; v1(4143.16,3438.93) 4443.62,3438.93 4652.16,3230.39 5024.16,3230.39 5028.16,3234.39 ; v1(4148.16,3399.39) 4403.16,3399.39 4668.16,3134.39 5028.16,3134.39 ; v1(4152.69,2988.39) 4159.16,2988.39 v1(4218.16,2929.39) ; v1(4163.16,3609.39) v1@4163.16,3615.4 ; 4172.16,4107.37 4163.16,4098.37 v1@4163.16,3615.4 ; v1(4288.16,3174.39) v1(4288.16,3284.39) ; v1(4334.26,4269.39) 4334.26,3748.28 v1(4463.16,3619.39) ; v1(4368.16,3319.39) v1(4613.16,3074.39) ; v1(4368.16,3899.39) 4427.16,3958.39 4427.16,4015.4 4423.16,4019.4 4423.16,4754.39 4373.16,4804.39 ; v1(4378.16,2939.39) v1(4423.16,2894.39) ; v1(4398.16,3349.39) v1(4643.16,3104.39) ; v1(4398.16,3999.39) 4398.16,4459.39 4273.16,4584.39 4273.16,4704.39 4323.16,4754.39 4323.16,4823.01 4403.71,4903.57 4403.98,4903.57 ; v1(4438.16,2364.39) v1(4535.13,2267.42) ; v1(4568.16,3474.39) 5028.16,3934.39 ; v1(4623.16,3429.39) 5028.16,3834.39 ; v1(4673.16,3379.39) 5028.16,3734.39 ; v1(4715.63,4006.91) 5041.56,4006.91 5076.69,3971.78 ; v1(4758.16,3364.39) 4758.16,3430.45 4962.1,3634.39 5028.16,3634.39 ; v1(4808.16,3419.39) 4834.16,3393.39 4834.16,3340.39 4868.16,3306.39 v1(4868.16,3299.39) ; v1(4863.16,3369.39) 5028.16,3534.39 ; 5076.69,2882.91 5028.16,2834.39 4927.16,2733.39 4113.1,2733.39 4098.1,2748.39 4042.16,2748.39 v1(4038.16,2744.39) ; 6408.16,4249.39 v1(6408.16,5079.39) ; 6437.16,4237.37 6437.16,5190.39 v1(6438.16,5189.39)
  Bottom Layer w20: v1(4773.57,2173.06) 4971.56,2173.06 5233.19,2434.69

## Silkscreen, mask and mechanical layers (free items; w line width, h text height)
Top Overlay:
  lines w3.94: 7391.81,5628.09 7396.58,5607.42 7413.54,5596.82 7431.04,5521.03 7452.24,5507.78 7453.83,5500.89 7437.93,5475.45 ; 7595.35,5359.4 7629.27,5338.2 7643.05,5341.38 7698.69,5430.43 7719.89,5464.35 7618.12,5527.94
  lines w4: 6972.14,5431.43 7014.55,5404.93 7042.11,5411.29 7343.16,5223.17 7356.94,5226.35 7380.79,5264.52 ; 7254.1,5420.32 7271.07,5409.72 7275.84,5389.06 7301.28,5373.16 7347.92,5344.01 7361.7,5347.19 7372.3,5364.15 ; 7420,5346.14 7398.8,5359.39 7395.62,5373.17 7491,5525.82 7489.41,5532.7 7480.93,5538 7476.16,5558.67
  lines w10: 2948.16,2344.39 2988.16,2304.39 2988.16,2194.39 ; 3548.16,4749.39 3613.16,4684.39 3613.16,4519.39
Mechanical 1:
  lines w0.5: 3326.13,4647.13 4630.74,4647.13 5553.23,3724.63 ; 3326.52,4652.13 2404.02,3729.63 2404.02,2425.02 3326.52,1502.52 4631.13,1502.52 5553.62,2425.02 5553.62,3729.63

## Text inside footprints (layer, text, board x,y; h text height)
C3: Top Overlay "+" at 4540.06,1531.87 h49.21 r45
C4: Top Overlay "+" at 4674.41,1666.22 h49.21 r45
P1: Top Overlay "4" at 4173.16,4784.39 h49.21; Top Overlay "1" at 4193.16,4684.39 h49.21; Top Overlay "3" at 4553.16,4684.39 h49.21; Top Overlay "6" at 4553.16,4784.39 h49.21